# EAGLE board motorcontroller_doppeleinheit (EAGLE 7.7.0)
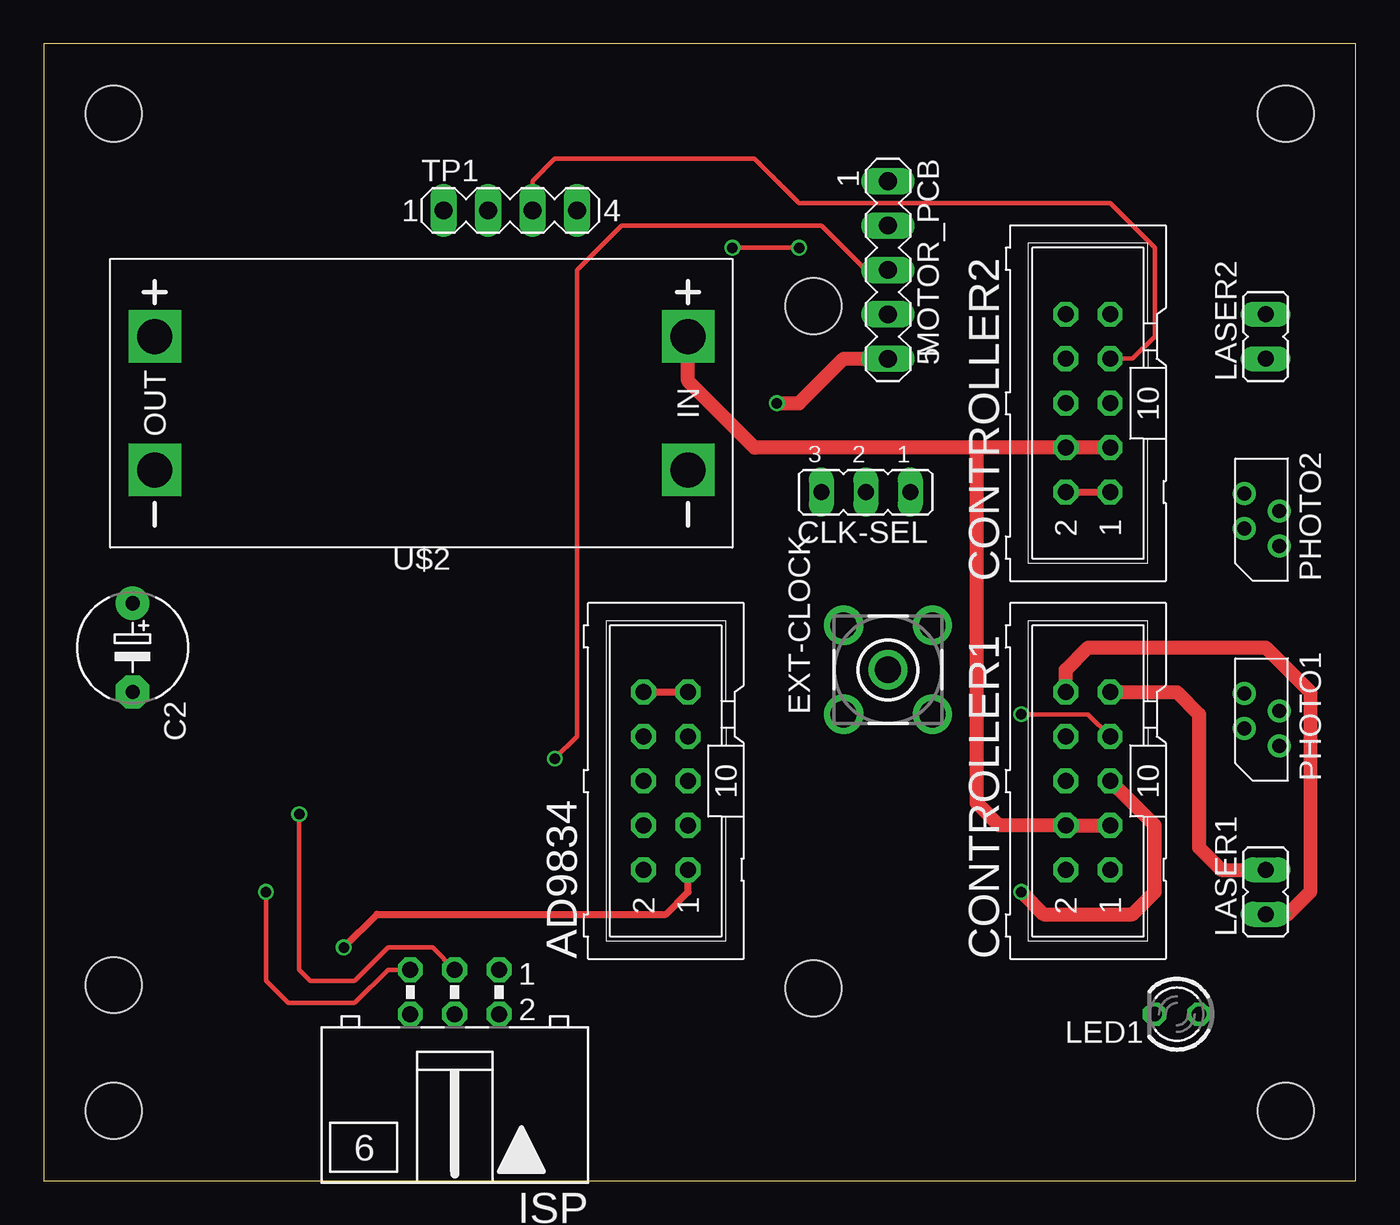
[diagram p0: board, top side]
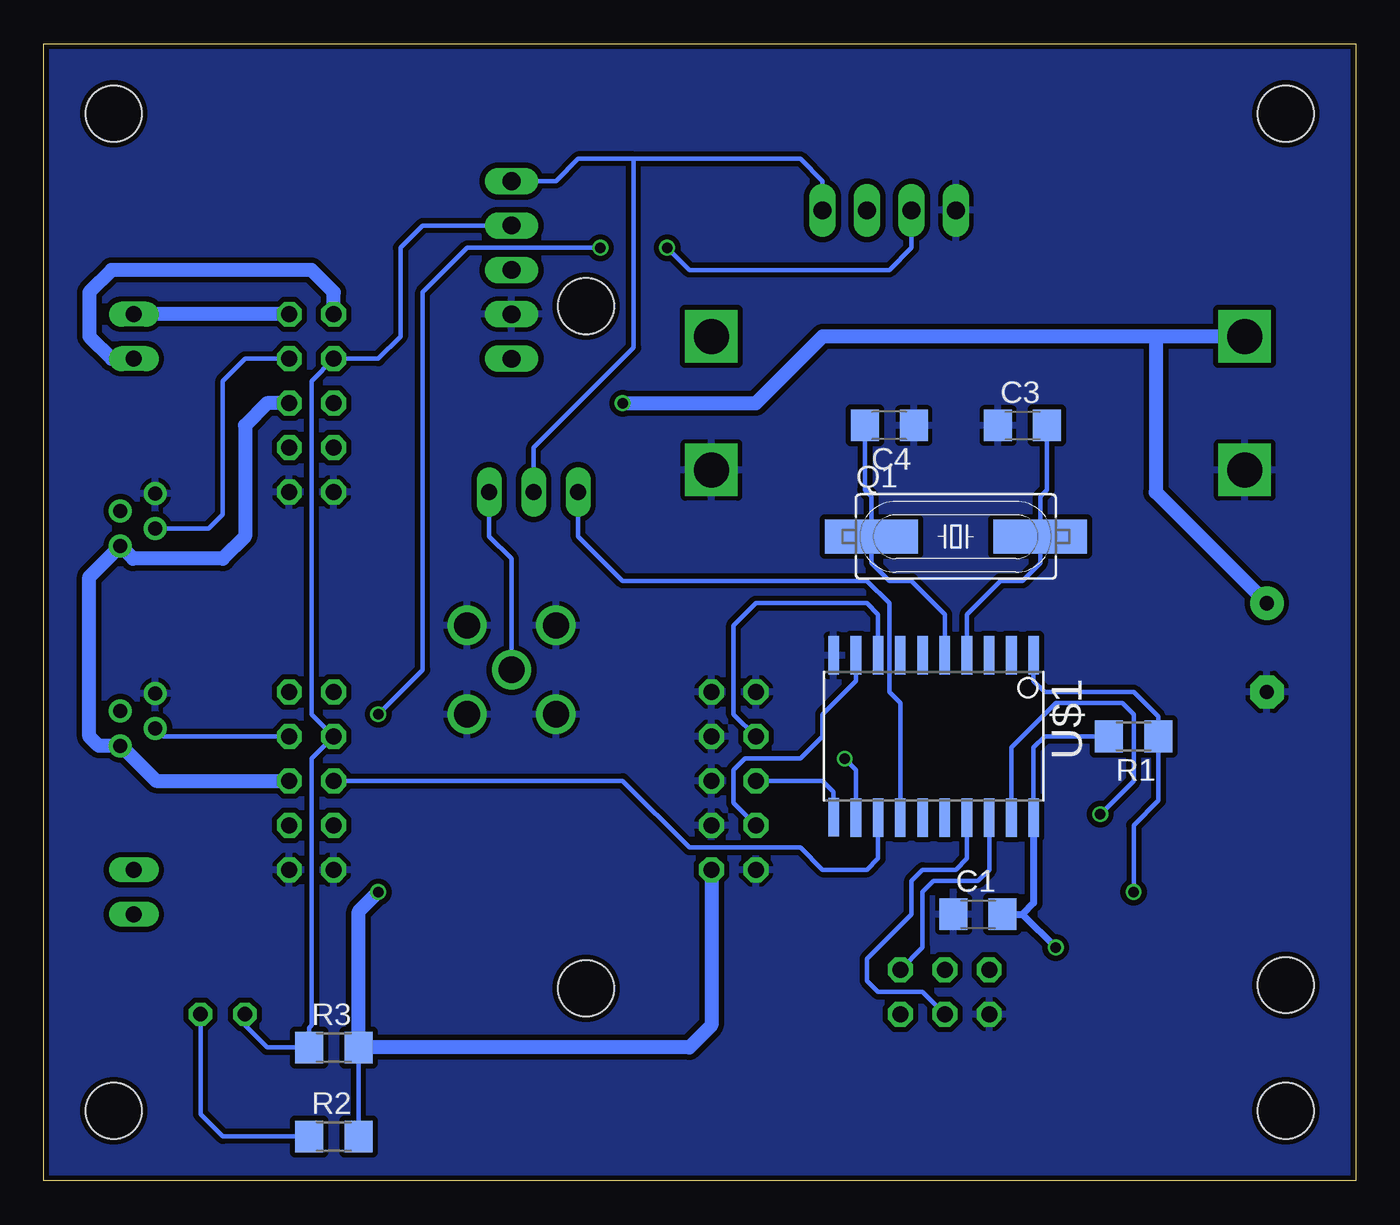
[diagram p1: board, bottom side, seen from below]

Size 75 x 65 mm. Coordinates in mm from the lower left corner, seen from the top.
Outline: 75,0 75,65 0,65 0,0 75,0
Copper layers (1*16): Top 0.035mm / dielectric 1.5mm / Bottom 0.035mm
Design rules "dirt_cheap_dirty_boards.v1": minimum track width 5mil, minimum drill 12mil, track to track 5mil, track to pad 5mil, pad to pad 5mil, via to via 5mil, smd to smd 0mil, copper to edge 10mil, drill to drill 10mil, minimum pad ring 10mil, minimum via ring 6mil, stop-mask expansion 2mil, vias tented up to drill 25mil, thermal gap 10mil
Holes 3.2 mm at 4,61 71,61 71,4 4,4 4,11.19 44,11 44,50

## Footprints (pad centres in the part's own frame; a part is rotated, then mirrored left to right if it is on the bottom)
ML10 = drill 0.914 octagon: 1 -5.08,-1.27; 2 -5.08,1.27; 3 -2.54,-1.27; 4 -2.54,1.27; 5 0,-1.27; 6 0,1.27; 7 2.54,-1.27; 8 2.54,1.27; 9 5.08,-1.27; 10 5.08,1.27
C1206 = smd 1.6 x 1.8: 1 -1.4,0; 2 1.4,0
E5-6 = drill 0.813 pad 1.905: + -2.54,0 | drill 0.813 pad 1.905 octagon: - 2.54,0
JP2 = drill 0.914 long: 1 -2.54,0; 2 0,0; 3 2.54,0
LTI-SASF54GT = drill 1.5 pad 2.2: 1 0,0; 2 -2.54,2.54; 3 2.54,2.54; 4 2.54,-2.54; 5 -2.54,-2.54
ML6L = drill 0.914 octagon: 1 -2.54,-1.27; 2 -2.54,1.27; 3 0,-1.27; 4 0,1.27; 5 2.54,-1.27; 6 2.54,1.27
JP1 = drill 0.914 long: 1 0,-1.27; 2 0,1.27
LED3MM = drill 0.813 octagon: A -1.27,0; K 1.27,0
MA05-1 = drill 1.016 long: 1 -5.08,0; 2 -2.54,0; 3 0,0; 4 2.54,0; 5 5.08,0
FLAT_4P = drill 0.8: P$1 2,0.5; P$2 3,2.5; P$3 4,0.5; P$4 5,2.5
HC49UP = smd 5.334 x 1.93: 1 -4.826,0; 2 4.826,0
R1206 = smd 1.6 x 1.803: 1 -1.422,0; 2 1.422,0
MA04-1 = drill 1.016 long: 1 -3.81,0; 2 -1.27,0; 3 1.27,0; 4 3.81,0
SO20L$ = smd 0.61 x 2.21: 1 -5.715,-4.636; 2 -4.445,-4.636; 3 -3.175,-4.636; 4 -1.905,-4.636; 5 -0.635,-4.636; 6 0.635,-4.636; 7 1.905,-4.636; 8 3.175,-4.636; 9 4.445,-4.636; 10 5.715,-4.636; 11 5.715,4.61; 12 4.445,4.636; 13 3.175,4.636; 14 1.905,4.636; 15 0.635,4.636; 16 -0.635,4.636; 17 -1.905,4.636; 18 -3.175,4.636; 19 -4.445,4.636; 20 -5.715,4.636
DC-DC-STEP-UP-MT3608 = drill 2 pad 2.8 square: IN+ 15.24,3.81; IN- 15.24,-3.81; OUT+ -15.24,3.81; OUT- -15.24,-3.81

## Placement (x,y rotation side)
AD9834  [ML10]  35.56,22.86 90 top
C1  100nF  [C1206]  21.59,15.24 0 bottom
C2  470µF 35V  [E5-6]  5.08,30.48 270 top
C3  22pF  [C1206]  19.05,43.18 0 bottom
C4  22pF  [C1206]  26.67,43.18 180 bottom
CLK-SEL  [JP2]  46.99,39.37 180 top
CONTROLLER1  [ML10]  59.69,22.86 90 top
CONTROLLER2  [ML10]  59.69,44.45 90 top
EXT-CLOCK  LTI-SASF54GT  [LTI-SASF54GT]  48.26,29.21 90 top
ISP  [ML6L]  23.5,10.79 180 top
LASER1  [JP1]  69.85,16.51 0 top
LASER2  [JP1]  69.85,48.26 0 top
LED1  [LED3MM]  64.77,9.53 180 top
MOTOR_PCB  [MA05-1]  48.26,52.07 270 top
PHOTO1  FLAT_P4  [FLAT_4P]  71.12,22.86 90 top
PHOTO2  FLAT_P4  [FLAT_4P]  71.12,34.29 90 top
Q1  16,384Mhz  [HC49UP]  22.86,36.83 0 bottom
R1  10k  [R1206]  12.7,25.4 180 bottom
R2  390  [R1206]  58.42,2.54 0 bottom
R3  10k  [R1206]  58.42,7.62 0 bottom
TP1  [MA04-1]  26.67,55.48 0 top
U$1  TINY2313-*S*  [SO20L$]  24.13,25.4 180 bottom
U$2  DC-DC-STEP-UP-MT3608  [DC-DC-STEP-UP-MT3608]  21.59,44.45 0 top

## Library data of the parts
AD9834 CONTROLLER1 CONTROLLER2 = con-ml; OC_FARNELL: unknown; OC_NEWARK: unknown
C1-C4 R1-R3 = rcl
CLK-SEL LASER1 LASER2 = jumper
EXT-CLOCK = con-coax; OC_FARNELL: unknown; OC_NEWARK: unknown
ISP = con-harting-ml; OC_FARNELL: unknown; OC_NEWARK: unknown
LED1 = led
MOTOR_PCB TP1 = con-lstb; OC_FARNELL: unknown; OC_NEWARK: unknown
PHOTO1 PHOTO2 = _custom_con
Q1 = crystal; OC_FARNELL: unknown; OC_NEWARK: unknown
U$1 = avr-7
U$2 = diy-modules

## Nets
+5V: AD9834.1 C1.2 CONTROLLER1.5 CONTROLLER2.5 PHOTO1.P$1 PHOTO2.P$1 R1.2 R2.2 R3.2 U$1.20
+12V: CONTROLLER1.3 CONTROLLER1.4 CONTROLLER2.3 CONTROLLER2.4 U$2.IN+
+24V: C2.+ MOTOR_PCB.5 U$2.OUT+
AD9834_CLK: AD9834.6 U$1.11
AD9834_FSY: AD9834.8 U$1.8
AD9834_SDA: AD9834.4 U$1.9
GND: AD9834.2 AD9834.3 AD9834.5 AD9834.7 AD9834.9 AD9834.10 C1.1 C2.- C3.1 C4.1 CONTROLLER1.1 CONTROLLER1.2 CONTROLLER2.1 CONTROLLER2.2 EXT-CLOCK.2 EXT-CLOCK.3 EXT-CLOCK.4 EXT-CLOCK.5 ISP.6 MOTOR_PCB.4 PHOTO1.P$4 PHOTO2.P$4 TP1.1 U$1.10 U$2.IN- U$2.OUT-
LASER1+: CONTROLLER1.10 LASER1.1
LASER1-: CONTROLLER1.9 LASER1.2
LASER2+: CONTROLLER2.10 LASER2.1
LASER2-: CONTROLLER2.9 LASER2.2
LOCKED: CONTROLLER1.8 CONTROLLER2.8 LED1.K MOTOR_PCB.2 R3.1
MISO: ISP.1 U$1.18
MOSI: ISP.4 U$1.17
MOTOR_EN: MOTOR_PCB.3 U$1.12
MOTOR_ON: CONTROLLER1.6 U$1.13
N$1: C4.2 Q1.1 U$1.5
N$2: LED1.A R2.1
N$3: CLK-SEL.3 U$1.14
N$4: CLK-SEL.1 EXT-CLOCK.1
N$5: C3.2 Q1.2 U$1.4
OPTO1: CONTROLLER1.7 PHOTO1.P$2 TP1.2
OPTO2: CONTROLLER2.7 PHOTO2.P$2 TP1.3
RST: ISP.5 R1.1 U$1.1
SCK: ISP.3 U$1.19
SPEED_CLK: CLK-SEL.2 MOTOR_PCB.1 TP1.4
TEMP: PHOTO2.P$3
VCC: ISP.2

## Tracks (layer width: path | path; a pad name or v marks a point on that pad's centre or on a via)
+5V  (via drill 0.6)
  Top 0.406: v17.14,13.34 19.05,15.24 35.56,15.24 36.83,16.51 AD9834.1
  Top 0.813: v55.88,16.51 57.15,15.24 62.23,15.24 63.5,16.51 63.5,20.32 CONTROLLER1.5
  Bottom 0.254: R1.2 17.78,25.4 18.41,24.77 U$1.20 | R2.2 R3.2
  Bottom 0.406: U$1.20 18.41,15.88 19.05,15.24 | PHOTO1.P$1 70.58,24.86 | C1.2 19.05,15.24 | 19.05,15.24 v17.14,13.34
  Bottom 0.813: AD9834.1 36.83,8.89 38.1,7.62 R3.2 57,15.39 v55.88,16.51 | 70.58,24.86 68.58,22.86 CONTROLLER1.5 | PHOTO1.P$1 71.85,24.86 72.39,25.4 72.39,34.52 PHOTO2.P$1 69.89,35.56 64.77,35.56 63.5,36.83 63.5,43.18 62.23,44.45 CONTROLLER2.5
+12V
  Top 0.813: CONTROLLER2.3 CONTROLLER2.4 53.34,41.91 | 53.34,41.91 40.64,41.91 36.83,45.72 U$2.IN+ | CONTROLLER1.3 CONTROLLER1.4 54.61,20.32 53.34,21.59 53.34,41.91
+24V  (via drill 0.6)
  Top 0.813: v41.91,44.45 43.18,44.45 45.72,46.99 MOTOR_PCB.5
  Bottom 0.813: U$2.OUT+ 11.43,48.26 | 11.43,48.26 11.43,39.37 C2.+ | 11.43,48.26 30.48,48.26 34.29,44.45 v41.91,44.45
AD9834_CLK
  Bottom 0.254: AD9834.6 30.48,22.86 29.84,22.23 U$1.11
AD9834_FSY
  Bottom 0.254: AD9834.8 35.56,26.67 35.56,31.75 34.29,33.02 27.94,33.02 27.3,32.38 U$1.8
AD9834_SDA
  Bottom 0.254: U$1.9 28.57,28.57 30.48,26.67 30.48,25.4 31.75,24.13 34.92,24.13 35.56,23.5 35.56,21.59 AD9834.4
GND
  Top 0.406: AD9834.10 AD9834.9 | CONTROLLER2.2 CONTROLLER2.1
  pour Bottom (isolate 0.305): 0,64.77 0,0 74.93,0 74.93,64.77
LASER1+
  Top 0.813: CONTROLLER1.10 58.42,29.21 59.69,30.48 69.85,30.48 72.39,27.94 72.39,16.51 71.12,15.24 LASER1.1
LASER1-
  Top 0.813: CONTROLLER1.9 64.77,27.94 66.04,26.67 66.04,19.05 67.31,17.78 LASER1.2
LASER2+
  Bottom 0.813: CONTROLLER2.10 58.42,50.8 59.69,52.07 71.12,52.07 72.39,50.8 72.39,48.26 71.12,46.99 LASER2.1
LASER2-
  Bottom 0.813: CONTROLLER2.9 LASER2.2
LOCKED
  Bottom 0.254: MOTOR_PCB.2 53.34,54.61 54.61,53.34 54.61,48.26 55.88,46.99 CONTROLLER2.8 59.69,45.72 59.69,26.67 CONTROLLER1.8 59.69,24.13 59.69,8.89 59.84,8.74 R3.1 62.23,7.62 63.5,8.89 LED1.K
MISO
  Bottom 0.254: U$1.18 20.95,17.78 21.59,17.14 24.13,17.14 24.77,16.51 24.77,13.34 ISP.1
MOSI
  Bottom 0.254: U$1.17 22.23,18.41 22.86,17.78 24.77,17.78 25.4,17.14 25.4,15.24 27.94,12.7 27.94,11.43 27.3,10.79 24.77,10.79 ISP.4
MOTOR_EN  (via drill 0.6)
  Top 0.254: v29.21,24.13 30.48,25.4 30.48,52.07 33.02,54.61 44.45,54.61 46.99,52.07 MOTOR_PCB.3
  Bottom 0.254: v29.21,24.13 28.57,23.5 U$1.12
MOTOR_ON
  Bottom 0.254: CONTROLLER1.6 41.91,22.86 38.1,19.05 31.75,19.05 30.48,17.78 27.94,17.78 27.3,18.41 U$1.13
N$1
  Bottom 0.254: C4.2 28.07,39.5 27.69,39.12 Q1.1 27.69,35.31 26.67,34.29 25.4,34.29 23.5,32.38 U$1.5
N$2
  Bottom 0.254: R2.1 64.77,2.54 66.04,3.81 LED1.A
N$3
  Bottom 0.254: U$1.14 26.04,27.3 26.67,27.94 26.67,33.02 27.94,34.29 41.91,34.29 44.45,36.83 CLK-SEL.3
N$4
  Bottom 0.254: EXT-CLOCK.1 48.26,35.56 49.53,36.83 CLK-SEL.1
N$5
  Bottom 0.254: C3.2 17.65,39.5 18.03,39.12 Q1.2 18.03,35.31 19.05,34.29 20.32,34.29 22.23,32.38 U$1.4
OPTO1  (via drill 0.6)
  Top 0.254: CONTROLLER1.7 59.69,26.67 v55.88,26.67 | v43.18,53.34 v39.37,53.34
  Bottom 0.254: CONTROLLER1.7 68.16,25.4 PHOTO1.P$2 | v43.18,53.34 50.8,53.34 53.34,50.8 53.34,29.21 v55.88,26.67 | TP1.2 25.4,53.34 26.67,52.07 38.1,52.07 v39.37,53.34
OPTO2
  Top 0.254: CONTROLLER2.7 62.23,46.99 63.5,48.26 63.5,53.34 60.96,55.88 43.18,55.88 40.64,58.42 29.21,58.42 27.94,57.15 TP1.3
  Bottom 0.254: PHOTO2.P$2 65.58,37.29 64.77,38.1 64.77,45.72 63.5,46.99 CONTROLLER2.7
RST  (via drill 0.6)
  Top 0.254: ISP.5 19.68,12.06 17.78,10.16 13.97,10.16 12.7,11.43 v12.7,16.51
  Bottom 0.254: U$1.1 18.41,28.57 17.78,27.94 12.7,27.94 11.3,26.54 R1.1 11.28,21.74 12.7,20.32 v12.7,16.51
SCK  (via drill 0.6)
  Top 0.254: v14.61,20.95 14.61,12.06 15.24,11.43 17.78,11.43 19.68,13.34 22.23,13.34 ISP.3
  Bottom 0.254: v14.61,20.95 12.7,22.86 12.7,26.67 13.34,27.3 17.14,27.3 19.68,24.77 U$1.19
SPEED_CLK
  Bottom 0.254: TP1.4 30.48,57.15 31.75,58.42 41.27,58.42 | CLK-SEL.2 46.99,41.91 41.27,47.62 41.27,58.42 | 41.27,58.42 44.45,58.42 45.72,57.15 MOTOR_PCB.1

## Text on the board
tPlace: PHOTO2 | PHOTO1